# EAGLE board pico-glitcher-v1 v89 (EAGLE 9.7.0)
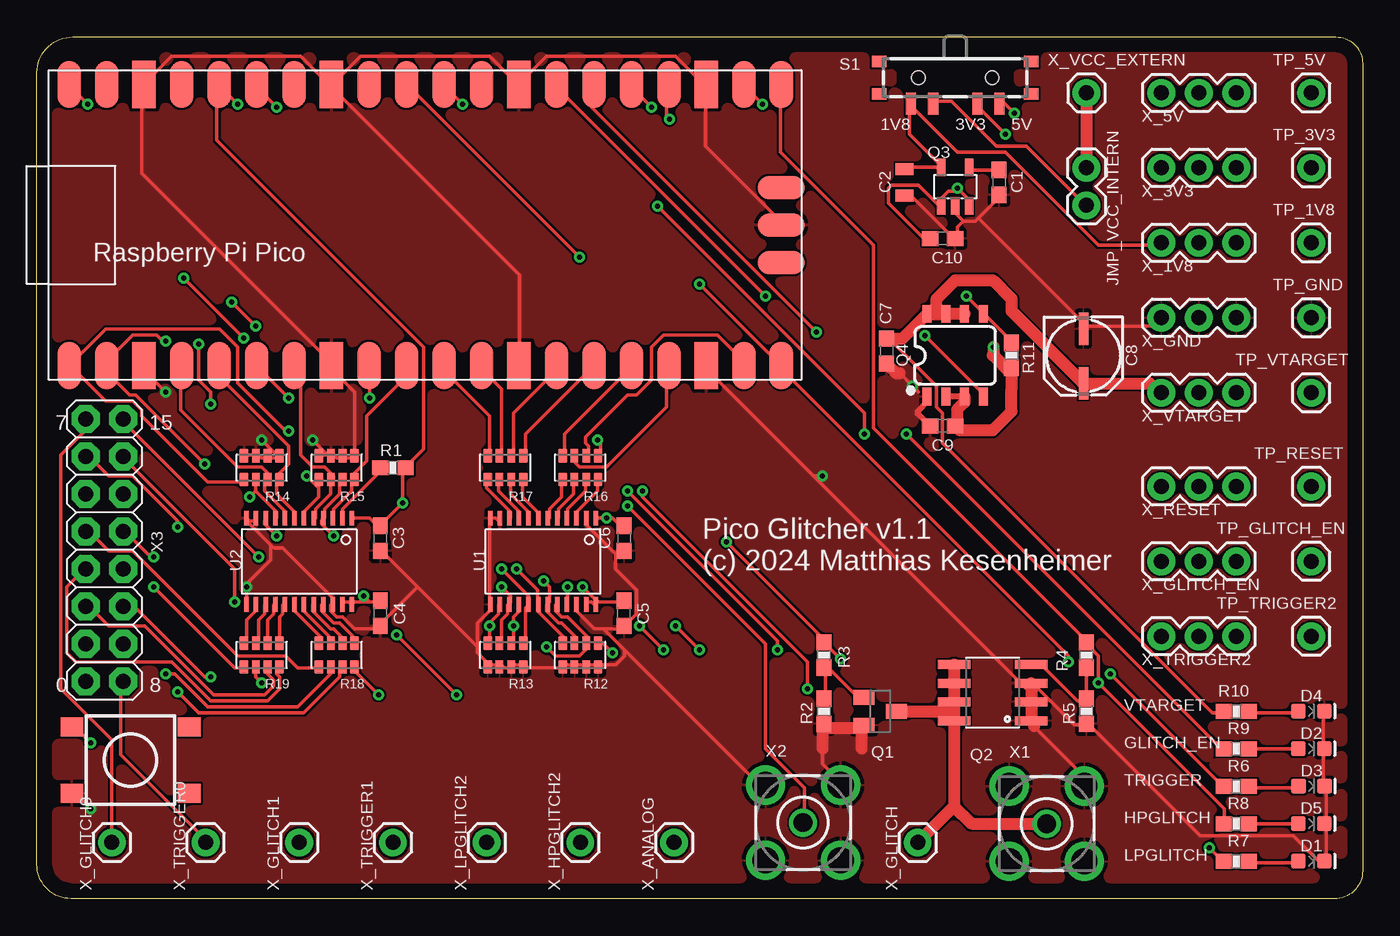
[diagram p0: board, top side]
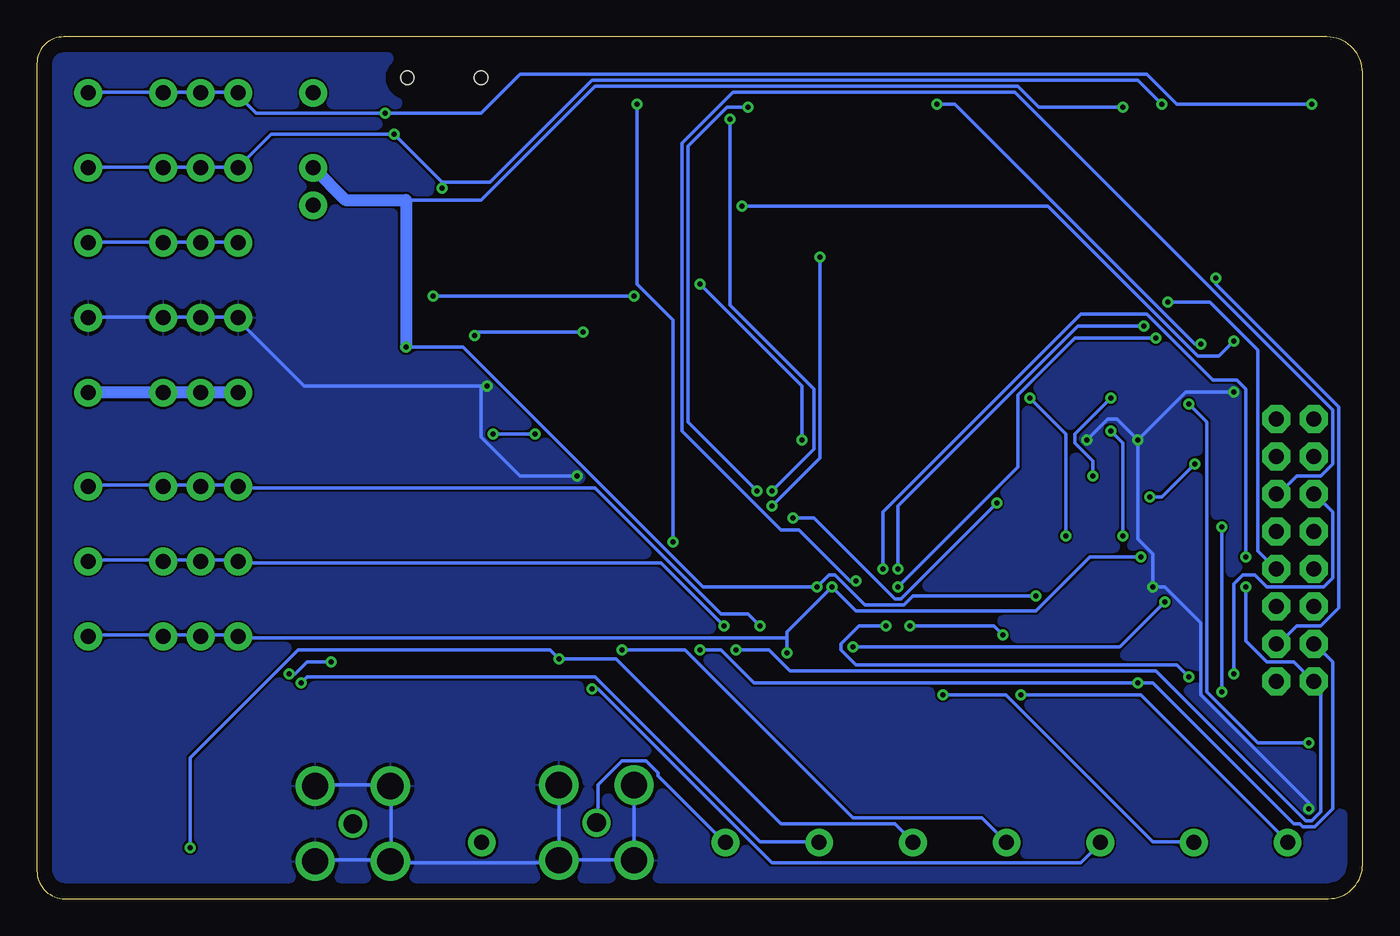
[diagram p1: board, bottom side, seen from below]

Size 89.84 x 58.41 mm. Coordinates in mm from the lower left corner, seen from the top.
Outline: 0,55.98 arc-90 2.43,58.41 88.04,58.41 arc-90 89.84,56.61 89.84,1.89 arc-90 87.95,0 2.32,0 arc-90 0,2.32 0,55.98
Copper layers (1*16): Top / Bottom
Stack-up Default Layer Stack: Top User Defined 0.035mm / Dielectric-1 User Defined 1.5mm / Bottom User Defined 0.035mm
Design rules: minimum drill size 0.35mm, minimum copper width 10mil, keepout clearance 0mil, drill distance 6mil, via restrict clearance 0mil, dimension clearance 40mil, restrict clearance 0mil, copper clearance wire_polygon to wire_polygon 6mil, copper clearance wire_polygon to pad_smd 6mil, copper clearance wire_polygon to via 6mil, copper clearance pad_smd to pad_smd 6mil, copper clearance pad_smd to via 6mil, copper clearance via to via 6mil, copper clearance smd to pad (same net) 6mil, copper clearance smd to via (same net) 6mil, copper clearance smd to smd (same net) 6mil

## Footprints (pad centres in the part's own frame; a part is rotated, then mirrored left to right if it is on the bottom)
0603 = smd 1.1 x 1: 1 -0.85,0; 2 0.85,0
0805 = smd 0.8 x 1.2: 1 -0.9,0; 2 0.9,0
PANASONIC_C = smd 2.2 x 0.65: + 1.9,-0.2; - -1.8,-0.2
LED-0603 = smd 1 x 1: A -0.877,0; C 0.877,0
1X02 = drill 1.016 pad 1.88: 1 0,0; 2 2.54,0
RPI_PICO = smd 3.2 x 1.6: 3V3 9.525,13.97; 3V3_EN 9.525,16.51; ADC_VREF 9.525,11.43; AGND 9.525,6.35; GND@1 -9.525,19.05; GND@2 -9.525,6.35; GND@3 -9.525,-6.35; GND@4 -9.525,-19.05; GND@6 9.525,-19.05; GND@7 9.525,-6.35; GND@8 9.525,19.05; GP0 -9.525,24.13; GP1 -9.525,21.59; GP2 -9.525,16.51; GP3 -9.525,13.97; GP4 -9.525,11.43; GP5 -9.525,8.89; GP6 -9.525,3.81; GP7 -9.525,1.27; GP8 -9.525,-1.27; GP9 -9.525,-3.81; GP10 -9.525,-8.89; GP11 -9.525,-11.43; GP12 -9.525,-13.97; GP13 -9.525,-16.51; GP14 -9.525,-21.59; GP15 -9.525,-24.13; GP16 9.525,-24.13; GP17 9.525,-21.59; GP18 9.525,-16.51; GP19 9.525,-13.97; GP20 9.525,-11.43; GP21 9.525,-8.89; GP22 9.525,-3.81; GP26_A0 9.525,1.27; GP27_A1 9.525,3.81; GP28_A2 9.525,8.89; RUN 9.525,-1.27; VBUS 9.525,24.13; VSYS 9.525,21.59 | smd 1.6 x 3.2: GND@5 0,-24.13; SWCLK -2.54,-24.13; SWDIO 2.54,-24.13
SOT23 = smd 1 x 1.4: 1 -0.95,-1.1; 2 0.95,-1.1; 3 0,1.1
SO08 = smd 0.61 x 2.21: 1 -1.905,-2.616; 2 -0.635,-2.616; 3 0.635,-2.616; 4 1.905,-2.616; 5 1.905,2.616; 6 0.635,2.616; 7 -0.635,2.616; 8 -1.905,2.616
SOT23-5L = smd 0.55 x 1.2: 1 -0.95,-1.3; 2 0,-1.3; 3 0.95,-1.3; 4 0.95,1.3; 5 -0.95,1.3
SO08' = smd 0.6 x 1.2: 1 -1.905,-2.8; 2 -0.635,-2.8; 3 0.635,-2.8; 4 1.905,-2.8; 5 1.905,2.8; 6 0.635,2.8; 7 -0.635,2.8; 8 -1.905,2.8
0603-RES = smd 1.1 x 1: 1 -0.85,0; 2 0.85,0
742C083103JP = smd 0.59 x 0.92: 1 -1.2,-0.8; 2 -0.4,-0.8; 3 0.4,-0.8; 4 1.2,-0.8; 5 1.2,0.8; 6 0.4,0.8; 7 -0.4,0.8; 8 -1.2,0.8
SWITCH-SP3T-SMD = smd 0.7 x 1.5: 1 3,-1.75; 2 1.5,-1.75; 3 -1.5,-1.75; 4 -3,-1.75 | smd 1 x 0.8: P$1 -5.15,-1.1; P$2 -5.15,1.1; P$3 5.15,1.1; P$4 5.15,-1.1 | hole 0.9: 2.5,0; -2.5,0
TACTILE_SWITCH_TALL = smd 1.55 x 1.3: A1 -3.975,-2.25; A2 3.975,-2.25; B1 -3.975,2.25; B2 3.975,2.25
1X01 = drill 1.016 pad 1.88: 1 0,0
TSSOP24 = smd 0.305 x 0.991: 1 -3.575,-2.918; 2 -2.925,-2.918; 3 -2.275,-2.918; 4 -1.625,-2.918; 5 -0.975,-2.918; 6 -0.325,-2.918; 7 0.325,-2.918; 8 0.975,-2.918; 9 1.625,-2.918; 10 2.275,-2.918; 11 2.925,-2.918; 12 3.575,-2.918; 13 3.575,2.918; 14 2.925,2.918; 15 2.275,2.918; 16 1.625,2.918; 17 0.975,2.918; 18 0.325,2.918; 19 -0.325,2.918; 20 -0.975,2.918; 21 -1.625,2.918; 22 -2.275,2.918; 23 -2.925,2.918; 24 -3.575,2.918
BU-SMA-V = drill 1.27: 1 0,0 | drill 1.778: 2 -2.55,2.55; 3 2.55,2.55; 4 2.55,-2.55; 5 -2.55,-2.55
2X8 = drill 1.016 pad 1.88 octagon: 1 0,0; 2 0,2.54; 3 2.54,0; 4 2.54,2.54; 5 5.08,0; 6 5.08,2.54; 7 7.62,0; 8 7.62,2.54; 9 10.16,0; 10 10.16,2.54; 11 12.7,0; 12 12.7,2.54; 13 15.24,0; 14 15.24,2.54; 15 17.78,0; 16 17.78,2.54
1X03 = drill 1.016 pad 1.88: 1 0,0; 2 2.54,0; 3 5.08,0

## Placement (x,y rotation side)
C1  0.01uF  [0603]  65.19,48.55 270 top
C2  2.2u  [0805]  58.79,48.55 270 top
C3  0.1uF  [0603]  23.28,24.42 270 top
C4  0.1uF  [0603]  23.28,19.34 90 top
C5  0.1uF  [0603]  39.79,19.34 90 top
C6  0.1uF  [0603]  39.79,24.42 270 top
C7  0.1uF  [0603]  57.57,37.12 270 top
C8  22uF  [PANASONIC_C]  71.12,36.83 270 top
C9  0.1uF  [0603]  61.38,32.04 0 top
C10  0.1uF  [0603]  61.38,44.74 0 top
D1  LED_RED_LPGLITCH  [LED-0603]  86.36,2.54 0 top
D2  LED_BLUE_GLITCH_EN  [LED-0603]  86.36,10.16 0 top
D3  LED_BLUE_TRIGGER2  [LED-0603]  86.37,7.62 0 top
D4  LED_RED_TARGET_POWER  [LED-0603]  86.36,12.7 0 top
D5  LED_RED_HPGLITCH  [LED-0603]  86.36,5.08 0 top
JMP_VCC_INTERN  JMP_VCC_INTERN  [1X02]  71.12,49.53 270 top
PICO  Raspberry Pi  [RPI_PICO]  26.31,45.66 90 top
Q1  IRLML2502  [SOT23]  57.15,12.7 270 top
Q2  IRF7807PBF  [SO08]  64.77,13.97 90 top
Q3  TPS 79318  [SOT23-5L]  62.23,48.26 0 top
Q4  TPS2041  [SO08']  62.23,36.83 0 top
R1  10K  [0603-RES]  24.13,29.21 0 top
R2  10K  [0603-RES]  53.34,12.7 90 top
R3  1R  [0603-RES]  53.34,16.51 90 top
R4  1R  [0603-RES]  71.12,16.51 90 top
R5  10K  [0603-RES]  71.12,12.7 90 top
R6  168  [0603-RES]  81.28,10.16 180 top
R7  168  [0603-RES]  81.28,2.54 180 top
R8  168  [0603-RES]  81.28,7.62 180 top
R9  220  [0603-RES]  81.28,12.7 180 top
R10  168  [0603-RES]  81.28,5.08 180 top
R11  10K  [0603-RES]  66.04,36.83 270 top
R12  10k  [742C083103JP]  36.83,16.51 180 top
R13  10k  [742C083103JP]  31.75,16.51 180 top
R14  10k  [742C083103JP]  15.24,29.21 180 top
R15  10k  [742C083103JP]  20.32,29.21 180 top
R16  100  [742C083103JP]  36.83,29.21 180 top
R17  100  [742C083103JP]  31.75,29.21 180 top
R18  100  [742C083103JP]  20.32,16.51 180 top
R19  100  [742C083103JP]  15.24,16.51 180 top
S1  Micro Slide Switch  [SWITCH-SP3T-SMD]  62.23,55.64 0 top
S_RST  SWITCH-MOMENTARY-2  [TACTILE_SWITCH_TALL]  6.35,9.39 180 top
TP_1V8  PINHDR_1X1  [1X01]  86.36,44.45 0 top
TP_3V3  PINHDR_1X1  [1X01]  86.36,49.53 0 top
TP_5V  M01PTH  [1X01]  86.36,54.61 0 top
TP_GLITCH_EN  PINHDR_1X1  [1X01]  86.36,22.86 0 top
TP_GND  PINHDR_1X1  [1X01]  86.36,39.37 0 top
TP_RESET  PINHDR_1X1  [1X01]  86.36,27.94 0 top
TP_TRIGGER2  PINHDR_1X1  [1X01]  86.36,17.78 0 top
TP_VTARGET  PINHDR_1X1  [1X01]  86.36,34.29 0 top
U1  NH245  [TSSOP24]  34.29,22.86 180 top
U2  NH245  [TSSOP24]  17.78,22.86 180 top
X1  BU-SMA-V  [BU-SMA-V]  68.43,5.08 0 top
X2  BU-SMA-V  [BU-SMA-V]  51.92,5.15 0 top
X3  M08X2  [2X8]  3.3,32.51 270 top
X_1V8  PINHDR_3X1  [1X03]  76.2,44.45 0 top
X_3V3  PINHDR_3X1  [1X03]  76.2,49.53 0 top
X_5V  PINHDR_3X1  [1X03]  76.2,54.61 0 top
X_ANALOG  PINHDR_1X1  [1X01]  43.18,3.81 0 top
X_GLITCH  PINHDR_1X1  [1X01]  59.69,3.81 0 top
X_GLITCH0  PINHDR_1X1  [1X01]  5.08,3.81 0 top
X_GLITCH1  PINHDR_1X1  [1X01]  17.78,3.81 0 top
X_GLITCH_EN  PINHDR_3X1  [1X03]  76.2,22.86 0 top
X_GND  PINHDR_3X1  [1X03]  76.2,39.37 0 top
X_HPGLITCH2  PINHDR_1X1  [1X01]  36.83,3.81 0 top
X_LPGLITCH2  PINHDR_1X1  [1X01]  30.48,3.81 0 top
X_RESET  PINHDR_3X1  [1X03]  76.2,27.94 0 top
X_TRIGGER0  PINHDR_1X1  [1X01]  11.43,3.81 0 top
X_TRIGGER1  PINHDR_1X1  [1X01]  24.13,3.81 0 top
X_TRIGGER2  PINHDR_3X1  [1X03]  76.2,17.78 0 top
X_VCC_EXTERN  PINHDR_1X1  [1X01]  71.12,54.61 0 top
X_VTARGET  PINHDR_3X1  [1X03]  76.2,34.29 0 top

## Library data of the parts
C1 = SparkFun-Capacitors; PROD_ID: CAP-16503; VALUE: 0.1uF
C2 = SparkFun-Capacitors
C3-C7 C9 C10 = SparkFun-Capacitors; PROD_ID: CAP-16503
C8 = SparkFun-Capacitors; PROD_ID: CAP-08618
D1-D5 = SparkFun-LED
JMP_VCC_INTERN TP_1V8 TP_3V3 TP_5V TP_GLITCH_EN TP_GND TP_RESET TP_TRIGGER2 TP_VTARGET X3 X_1V8 X_3V3 X_5V X_ANALOG X_GLITCH X_GLITCH0 X_GLITCH1 X_GLITCH_EN X_GND X_HPGLITCH2 X_LPGLITCH2 X_RESET X_TRIGGER0 X_TRIGGER1 X_TRIGGER2 X_VCC_EXTERN X_VTARGET = SparkFun-Connectors
PICO = RaspberryPi_Pico
Q1 = Transistor; CATEGORY: Transistor; SUB-CATEGORY: MOSFET; TYPE: N-Channel
Q2 S1 S_RST = SparkFun
Q3 = tps769xx
Q4 = TPS2041
R1-R11 = SparkFun-Resistors; PROD_ID: RES-00824
R12-R19 = Resistor Array; CREATED_BY: PCBLayout.com; DIGIKEY_PN: 742C083103JPTR-ND; MANUFACTURER: CTS Resistor Products; MPN: 742C083103JP; PACKAGE: 1206
U1 U2 = TI_NH245_SN74LVC8T245
X1 X2 = con-coax; OC_FARNELL: unknown; OC_NEWARK: unknown

## Nets
+1V8: C2.1 Q3.5 S1.4 TP_1V8.1 X_1V8.1 X_1V8.2 X_1V8.3
+3V3: C3.1 C6.1 C10.1 PICO.3V3 Q3.1 Q3.3 R1.2 S1.2 TP_3V3.1 U1.1 U2.1 X_3V3.1 X_3V3.2 X_3V3.3
+5V: PICO.VBUS S1.1 TP_5V.1 X_5V.1 X_5V.2 X_5V.3
ANALOG: PICO.GP26_A0 X2.1 X_ANALOG.1
GLITCH: Q1.3 Q2.5 Q2.6 Q2.7 Q2.8 X1.1 X_GLITCH.1
GND: C1.2 C2.2 C3.2 C4.1 C5.1 C6.2 C7.2 C8.- C9.1 C10.2 D1.C D2.C D3.C D4.C D5.C PICO.AGND PICO.GND@1 PICO.GND@2 PICO.GND@3 PICO.GND@4 PICO.GND@5 PICO.GND@6 PICO.GND@7 PICO.GND@8 Q1.2 Q2.1 Q2.2 Q2.3 Q3.2 Q4.1 R2.1 R5.1 R12.5 R12.6 R12.7 R12.8 R13.5 R13.6 R13.7 R13.8 R14.1 R14.2 R14.3 R14.4 R15.1 R15.2 R15.3 R15.4 S_RST.B2 TP_GND.1 U1.2 U1.11 U1.12 U1.13 U1.22 U2.11 U2.12 U2.13 U2.22 X1.2 X1.3 X1.4 X1.5 X2.2 X2.3 X2.4 X2.5 X_GND.1 X_GND.2 X_GND.3
GP0: PICO.GP0 R14.5 U2.10
GP1: PICO.GP1 R6.2 R14.6 U2.9
GP2: PICO.GP2 R14.7 U2.8
GP3: PICO.GP3 R14.8 U2.7
GP4: PICO.GP4 R15.5 U2.6
GP5: PICO.GP5 R15.6 U2.5
GP6: PICO.GP6 R15.7 U2.4
GP7: PICO.GP7 R15.8 U2.3
GP8: PICO.GP8 R17.4
GP9: PICO.GP9 R17.3
GP10: PICO.GP10 R17.2
GP11: PICO.GP11 R17.1
GP12: PICO.GP12 R16.4
GP13: PICO.GP13 R16.3
GP14: PICO.GP14 R16.2
GP15: PICO.GP15 R8.2 R16.1
HPGLITCH2: PICO.GP16 R4.2 R10.2 X_HPGLITCH2.1
JVCC: JMP_VCC_INTERN.2 S1.3
LPGLITCH2: PICO.GP17 R3.2 R7.2 X_LPGLITCH2.1
N$1: D3.A R8.1
N$2: D1.A R7.1
N$3: Q1.1 R2.2 R3.1
N$4: D2.A R6.1
N$5: Q2.4 R4.1 R5.2
N$6: D4.A R9.1
N$7: D5.A R10.1
N$8: C1.1 Q3.4
N$9: R18.1 U2.21
N$10: R18.2 U2.20
N$11: R18.3 U2.19
N$12: R18.4 U2.18
N$13: R19.1 U2.17
N$14: R19.2 U2.16
N$15: R19.3 U2.15
N$16: R19.4 U2.14
N$17: R16.8 U1.3
N$18: R16.7 U1.4
N$19: R16.6 U1.5
N$20: R16.5 U1.6
N$21: R17.8 U1.7
N$22: R17.7 U1.8
N$23: R17.6 U1.9
N$24: R17.5 U1.10
N$26: R12.1 TP_TRIGGER2.1 U1.21 X3.2 X_TRIGGER2.1 X_TRIGGER2.2 X_TRIGGER2.3
N$33: R1.1 U2.2
N$34: PICO.RUN S_RST.A2
N$37: PICO.GP19 X_GLITCH1.1
N$38: R19.5 TP_RESET.1 X3.15 X_RESET.1 X_RESET.2 X_RESET.3
N$39: R19.6 TP_GLITCH_EN.1 X3.13 X_GLITCH_EN.1 X_GLITCH_EN.2 X_GLITCH_EN.3
N$40: R19.7 X3.11
N$41: R19.8 X3.9
N$42: R18.5 X3.7
N$43: R18.6 X3.5
N$44: R18.7 X3.3
N$45: R18.8 X3.1 X_GLITCH0.1
N$47: R12.2 U1.20 X3.4
N$48: R12.3 U1.19 X3.6
N$49: R12.4 U1.18 X3.8
N$50: R13.1 U1.17 X3.10
N$51: R13.2 U1.16 X3.12
N$52: R13.3 U1.15 X3.14
N$53: R13.4 U1.14 X3.16 X_TRIGGER0.1
N$54: PICO.GP18 X_TRIGGER1.1
VCC: C4.2 C5.2 C9.2 JMP_VCC_INTERN.1 PICO.ADC_VREF Q4.2 Q4.3 R11.2 U1.23 U1.24 U2.23 U2.24 X_VCC_EXTERN.1
VTARGET: C7.1 C8.+ Q4.6 Q4.7 Q4.8 R9.2 TP_VTARGET.1 X_VTARGET.1 X_VTARGET.2 X_VTARGET.3
VTARGET_EN: PICO.GP20 Q4.4
VTARGET_OC: PICO.GP21 Q4.5 R11.1

## Tracks (layer width: path | path; a pad name or v marks a point on that pad's centre or on a via)
+1V8
  Top 0.254: C2.1 58.93,49.58 60.96,49.58 61.16,49.38 Q3.5 61.37,49.58 59.13,51.82 59.13,53.85 | 59.13,53.85 62.38,50.6 65.63,50.6 71.93,44.3 76.2,44.3 X_1V8.1 | 59.13,53.85 S1.4
  Bottom 0.254: 81.28,44.5 78.84,44.5 X_1V8.2 78.64,44.5 76.2,44.5 X_1V8.1 | 81.28,44.5 86.36,44.5 TP_1V8.1 | 81.28,44.5 X_1V8.3
+3V3  (via drill 0.35)
  Top 0.254: C10.1 60.35,44.7 60.15,44.7 57.71,47.14 57.71,48.16 57.91,48.36 59.74,48.36 61.16,46.94 Q3.1 61.37,47.14 61.37,47.55 61.77,47.95 62.59,47.95 | 62.59,47.95 63.2,47.35 63.2,47.14 Q3.3 | v65.63,51.82 63.6,53.85 S1.2 | v62.38,48.16 62.59,47.95 | U1.1 38,25.81 v38.61,25.81 39.01,25.81 39.62,25.2 C6.1 | U2.1 21.34,25.81 22.55,25.81 23.16,25.2 C3.1 23.37,25.4 v24.79,26.82 24.79,29.06 R1.2 24.99,29.26 26.21,30.48 26.21,37.39 12.19,51.41 12.19,55.07 PICO.3V3 12.39,55.07 v13.61,53.85
  Bottom 0.254: 81.28,49.58 78.84,49.58 X_3V3.2 78.64,49.58 76.2,49.58 | 81.28,49.58 86.36,49.58 TP_3V3.1 | 81.28,49.58 X_3V3.3 | 76.2,49.58 73.97,51.82 v65.63,51.82 62.38,48.56 | 62.38,48.56 v62.38,48.16 | 76.2,49.58 X_3V3.1 | v38.61,25.81 37.19,25.81 31.7,20.32 31.29,20.32 v24.79,26.82 | 62.38,48.56 59.13,48.56 52.22,55.47 15.24,55.47 v13.61,53.85
+5V  (via drill 0.35)
  Top 0.254: v66.24,53.24 65.43,54.05 S1.1 | v3.45,53.85 2.23,55.07 PICO.VBUS
  Bottom 0.254: 81.28,54.66 78.84,54.66 X_5V.2 78.64,54.66 76.2,54.66 X_5V.1 76.2,54.46 74.98,53.24 v66.24,53.24 59.74,53.24 57.1,55.88 14.63,55.88 12.6,53.85 v3.45,53.85 | 81.28,54.66 86.36,54.66 TP_5V.1 | 81.28,54.66 X_5V.3
ANALOG  (via drill 0.35)
  Top 0.254: v36.78,43.48 25.2,55.07 PICO.GP26_A0 | v40.03,26.62 49.38,17.27 49.38,10.16 52.02,7.52 52.02,5.28 X2.1
  Bottom 0.254: v36.78,43.48 36.78,29.87 v40.03,26.62 | X_ANALOG.1 43.28,3.86 47.75,8.33 47.75,8.53 48.56,9.35 50.19,9.35 51.82,7.72 51.82,5.28 X2.1
GLITCH
  Top 0.813: 62.15,6.27 Q2.8 62.15,12.7 | 62.15,6.27 X_GLITCH.1 | 62.15,6.27 63.35,5.08 X1.1 | Q2.5 Q2.6 Q2.7 62.15,12.7 | Q1.3 62.15,12.7
GND  (via drill 0.35)
  Top 0.254: 45.31,55.07 45.31,51 50.6,45.72 PICO.GND@5 | 19.91,55.07 32.72,42.27 32.72,36.17 PICO.GND@3 | 45.31,55.07 43.28,57.1 34.54,57.1 32.72,55.27 PICO.GND@7 32.51,55.27 30.68,57.1 21.95,57.1 20.12,55.27 PICO.AGND 19.91,55.07 | 45.31,55.07 PICO.GND@6 | 19.71,30.07 19.3,30.07 R15.4 | 19.71,30.07 19.91,29.87 R15.3 | R15.3 20.12,30.07 20.32,29.87 20.52,29.87 R15.2 20.73,30.07 20.93,29.87 21.34,29.87 R15.1 21.54,30.07 21.54,34.34 19.91,35.97 PICO.GND@2 20.12,36.17 7.11,49.17 7.11,55.07 PICO.GND@8 7.32,55.27 9.14,57.1 17.88,57.1 19.91,55.07 | R14.4 14.22,30.07 14.63,30.07 14.83,29.87 R14.3 15.04,30.07 15.24,29.87 15.44,29.87 R14.2 15.65,30.07 15.85,29.87 16.26,29.87 R14.1 16.26,30.07 v15.24,31.09 | 15.85,23.98 15.85,22.96 14.22,21.34 v14.22,21.13 14.22,20.12 U2.13 | 15.85,23.98 14.22,25.6 U2.12 14.22,25.81 14.43,25.6 14.83,25.6 U2.11 | 15.85,23.98 16.05,23.77 16.66,23.77 20.12,20.32 20.12,20.12 U2.22 19.91,19.91 19.91,19.51 20.32,19.1 20.73,19.1 21.54,18.29 23.16,18.29 C4.1 23.37,18.49 23.37,18.69 25.81,21.13 | v3.66,6.1 2.44,7.32 S_RST.B2 | v8.74,34.34 7.11,35.97 PICO.GND@1 | v18.69,31.09 19.71,30.07 | 19.71,30.07 R15.3 | C2.2 58.93,47.75 59.13,47.75 62.18,44.7 C10.2 62.38,44.91 62.38,45.52 62.79,45.92 | 63.8,46.13 63.6,45.92 62.79,45.92 | 63.8,46.13 65.02,47.35 65.02,47.55 C1.2 | 62.79,45.92 62.18,46.53 62.18,46.94 Q3.2 | 63.8,46.13 71.12,38.81 | 59.74,34.34 v59.33,34.75 58.47,35.61 | 71.12,38.81 75.79,38.81 76.2,39.22 X_GND.1 | 71.12,38.81 C8.- | 39.22,23.37 37.19,25.4 37.19,25.6 U1.2 | 39.22,23.37 39.62,23.37 C6.2 | 38.41,18.29 39.62,18.29 C5.1 39.83,18.49 40.64,19.3 40.64,20.93 39.22,22.35 39.22,23.37
  Top 0.254: 38.41,18.29 37.8,18.29 36.58,19.51 36.58,19.91 U1.22 | U1.11 31.29,25.6 31.09,25.81 30.68,25.81 U1.12 30.68,25.6 30.68,20.12 U1.13 30.68,19.91 30.68,19.51 29.87,18.69 29.87,17.07 | 30.68,15.85 31.09,15.85 31.29,15.65 R13.6 31.5,15.85 31.7,15.65 32.11,15.65 R13.7 32.31,15.85 32.72,15.85 32.92,15.65 R13.8 33.12,15.85 33.33,15.65 35.56,15.65 R12.5 35.76,15.85 36.17,15.85 36.37,15.65 R12.6 36.58,15.85 36.98,15.85 37.19,15.65 R12.7 37.39,15.85 37.8,15.85 38,15.65 R12.8 38.2,15.85 39.22,15.85 39.83,16.46 39.83,16.87 | 29.87,17.07 29.87,16.66 30.68,15.85 | 30.68,15.85 R13.5 | 29.87,17.07 25.81,21.13 | 25.81,21.13 23.37,23.57 C3.2 | 39.83,16.87 38.41,18.29 | 55.88,11.58 Q1.2 | 53.24,11.79 53.24,10.16 53.24,9.14 54.66,7.72 X2.3 | D4.C 87.17,12.6 87.17,10.36 87.38,10.16 D2.C 87.17,10.16 87.17,7.92 87.38,7.72 D3.C 87.17,7.52 87.38,7.32 87.38,5.08 D5.C 87.17,5.08 87.38,4.88 87.38,2.64 D1.C 87.17,2.44 86.97,2.44 85.14,4.27 78.84,4.27 71.12,11.99 R5.1 71.12,11.79 70.31,11.79 67.46,14.63 Q2.3 67.26,14.43 67.46,14.22 67.46,13.82 | 67.46,13.82 67.46,13.41 Q2.2 | 67.46,13.82 52.63,28.65 | 52.63,28.65 45.31,35.97 PICO.GND@4 | 67.56,11.68 71.12,8.13 71.12,7.72 X1.3 | 39.83,16.87 49.17,7.52 X2.2 | 52.63,28.65 v53.24,28.65
  Top 0.406: Q4.1 60.33,33.66 59.69,33.02 59.69,32.88 C9.1
  Top 0.813: Q2.3 Q2.2 Q2.1 67.56,11.89 67.56,11.68 | 55.88,11.58 53.61,11.58 R2.1 53.24,11.75 53.24,10.16 | Q1.2 55.88,11.58 55.88,10.16 | C7.2 58.23,35.61 58.47,35.61
  Bottom 0.254: v3.66,6.1 3.66,6.5 10.97,13.82 10.97,18.69 13.41,21.13 v14.22,21.13 14.22,23.37 15.24,24.38 v15.24,31.09 | v8.74,34.34 11.99,34.34 v15.24,31.09 | v18.69,31.09 17.27,32.51 16.66,32.51 v15.24,31.09 | 81.28,39.42 78.84,39.42 X_GND.2 78.64,39.42 76.2,39.42 X_GND.1 76.2,39.22 71.73,34.75 59.74,34.75 | 81.28,39.42 86.36,39.42 TP_GND.1 | 81.28,39.42 X_GND.3 | 59.74,34.75 v59.33,34.75 | 49.38,2.64 49.38,7.52 X2.2 | 54.46,2.64 54.46,7.52 X2.3 | 54.46,2.64 49.38,2.64 | 49.38,2.64 X2.5 | 54.46,2.64 X2.4 54.66,2.44 65.84,2.44 X1.5 | X1.5 65.84,2.64 65.84,7.52 X1.2 66.04,7.72 70.92,7.72 X1.3 | X1.4 70.92,2.64 66.04,2.64 X1.5 | 59.74,34.75 59.74,31.29 57.1,28.65 v53.24,28.65
  pour Top: 0,58.42 90.17,58.42 90.17,0 0,0
  pour Bottom: 0,58.42 90.17,58.42 90.17,0 0,0
GP0  (via drill 0.35)
  Top 0.254: 2.23,36.17 4.67,33.73 6.5,33.73 7.11,33.12 7.11,32.72 11.58,28.25 14.02,28.25 R14.5 | v16.26,24.59 15.44,25.4 15.44,25.6 U2.10 | v17.07,31.7 16.87,31.7 13.61,34.95 13.61,37.39 12.39,38.61 4.67,38.61 2.23,36.17 | 2.23,36.17 PICO.GP0
  Bottom 0.254: v16.26,24.59 16.26,30.89 v17.07,31.7
GP1  (via drill 0.35)
  Top 0.254: 14.83,27.64 14.83,28.25 R14.6 | 14.83,27.64 16.26,26.21 16.26,25.81 U2.9 | v58.93,31.5 80.26,10.16 R6.2 | v56.08,31.5 56.08,32.92 v42.06,46.94 | v8.74,37.8 8.53,37.8 8.13,38.2 6.5,38.2 4.88,36.58 4.88,36.17 PICO.GP1 4.67,35.97 4.67,35.76 6.3,34.14 6.71,34.14 v11.38,29.46 | v14.43,27.23 14.83,27.64
  Bottom 0.254: v56.08,31.5 v58.93,31.5 | v42.06,46.94 21.34,46.94 11.18,36.78 9.75,36.78 v8.74,37.8 | v14.43,27.23 13.61,27.23 v11.38,29.46
GP2
  Top 0.254: U2.8 16.87,25.81 16.87,26.21 15.44,27.64 15.44,28.25 R14.7 15.65,28.45 15.65,28.85 15.24,29.26 13.61,29.26 9.75,33.12 9.75,35.97 PICO.GP2
GP3
  Top 0.254: U2.7 17.48,25.81 17.48,26.21 16.26,27.43 16.26,28.25 R14.8 16.46,28.45 16.46,28.85 17.07,29.46 17.07,30.68 12.19,35.56 12.19,35.97 PICO.GP3
GP4  (via drill 0.35)
  Top 0.254: 19.1,27.84 19.1,27.23 18.09,26.21 18.09,25.81 U2.6 | 19.1,27.84 19.1,28.25 R15.5 | v18.29,28.65 19.1,27.84 | v17.07,33.93 15.04,35.97 PICO.GP4
  Bottom 0.254: v18.29,28.65 18.29,29.67 19.51,30.89 19.51,31.5 v17.07,33.93
GP5
  Top 0.254: U2.5 18.9,25.81 18.9,26.42 19.91,27.43 19.91,28.25 R15.6 20.12,28.45 20.12,28.65 19.51,29.26 18.69,29.26 17.88,30.07 17.88,35.36 17.27,35.97 PICO.GP5
GP6  (via drill 0.35)
  Top 0.254: R15.7 20.52,28.25 20.52,27.43 19.51,26.42 19.51,25.81 U2.4 19.3,25.6 19.3,25.4 v20.12,24.59 | v22.55,33.93 22.55,35.76 22.35,35.97 PICO.GP6
  Bottom 0.254: v20.12,24.59 20.12,31.5 v22.55,33.93
GP7
  Top 0.254: U2.3 20.12,25.81 20.12,26.42 21.34,27.64 21.34,28.25 R15.8 21.54,28.45 21.54,28.85 22.35,29.67 22.35,32.72 24.99,35.36 24.99,35.97 PICO.GP7
GP8
  Top 0.254: R17.4 30.68,30.07 30.68,32.72 27.43,35.97 PICO.GP8
GP9
  Top 0.254: R17.3 31.5,30.07 31.5,34.54 30.07,35.97 PICO.GP9
GP10
  Top 0.254: R17.2 32.31,30.07 32.31,32.92 35.15,35.76 35.15,35.97 PICO.GP10
GP11
  Top 0.254: R17.1 33.12,30.07 33.12,31.5 37.59,35.97 PICO.GP11
GP12
  Top 0.254: R16.4 35.76,30.07 35.76,31.5 40.23,35.97 PICO.GP12
GP13
  Top 0.254: R16.3 36.37,29.87 36.37,29.67 36.78,29.26 38.61,29.26 42.67,33.33 42.67,35.97 PICO.GP13
GP14
  Top 0.254: R16.2 37.39,30.07 37.39,30.68 37.19,30.89 37.19,31.29 40.03,34.14 40.64,34.14 41.66,35.15 41.66,37.39 42.47,38.2 46.13,38.2 47.95,36.37 47.95,36.17 PICO.GP14
GP15  (via drill 0.35)
  Top 0.254: v38,31.09 38.2,30.89 38.2,30.07 R16.1 | v44.91,41.66 50.39,36.17 PICO.GP15 50.39,35.97 69.9,16.46 v69.9,16.05 | v72.75,15.24 80.26,7.72 R8.2
  Bottom 0.254: v38,31.09 38,34.75 v44.91,41.66 | v72.75,15.24 72.34,15.24 71.53,16.05 v69.9,16.05
HPGLITCH2  (via drill 0.35)
  Top 0.254: R10.2 80.47,5.08 80.47,6.1 v71.93,14.63 71.93,16.46 71.12,17.27 R4.2 71.12,17.48 56.69,31.9 56.69,44.3 50.39,50.6 50.39,55.07 PICO.GP16
  Bottom 0.254: v71.93,14.63 71.53,15.04 52.02,15.04 40.84,3.86 36.98,3.86 X_HPGLITCH2.1
JVCC
  Top 0.254: S1.3 60.76,54.05 61.98,54.05 65.02,51 67.06,51 71.12,46.94 JMP_VCC_INTERN.2
LPGLITCH2  (via drill 0.35)
  Top 0.254: v54.46,16.26 53.44,17.27 R3.2 53.44,17.48 v46.74,24.18 | v79.45,3.45 80.26,2.64 R7.2 | v49.17,53.85 47.95,55.07 PICO.GP17
  Bottom 0.254: X_LPGLITCH2.1 30.48,3.86 31.7,5.08 39.42,5.08 50.6,16.26 v54.46,16.26 55.07,16.87 72.14,16.87 79.45,9.55 v79.45,3.45 | v49.17,53.85 49.17,41.66 46.74,39.22 v46.74,24.18
N$1
  Top 0.254: D3.A 85.34,7.52 82.5,7.52 82.3,7.72 R8.1
N$2
  Top 0.254: D1.A 85.34,2.44 82.5,2.44 82.3,2.64 R7.1
N$3
  Top 0.254: R2.2 53.44,13.61 53.44,15.44 53.24,15.65 R3.1 53.44,15.85 55.68,13.61 55.88,13.61 Q1.1
N$4
  Top 0.254: R6.1 D2.A
N$5
  Top 0.254: R4.1 R5.2 71.12,13.41 70.51,13.41 67.87,16.05 67.46,16.05 Q2.4
N$6
  Top 0.254: D4.A 85.34,12.6 82.5,12.6 82.3,12.8 R9.1
N$7
  Top 0.254: R10.1 D5.A
N$8
  Top 0.254: C1.1 65.02,49.38 63.4,49.38 63.2,49.58 Q3.4
N$9
  Top 0.254: R18.1 21.54,17.48 21.54,17.68 20.52,18.69 20.12,18.69 19.3,19.51 19.3,19.91 U2.21
N$10
  Top 0.254: R18.2 20.73,17.48 20.73,17.68 20.12,18.29 19.91,18.29 18.69,19.51 18.69,19.91 U2.20
N$11
  Top 0.254: R18.3 20.12,17.48 18.09,19.51 18.09,19.91 U2.19
N$12
  Top 0.254: R18.4 19.3,17.48 19.3,17.68 17.48,19.51 17.48,19.91 U2.18
N$13
  Top 0.254: R19.1 16.46,17.48 16.46,19.1 16.66,19.3 16.66,19.91 U2.17
N$14
  Top 0.254: R19.2 15.65,17.48 15.65,18.9 16.05,19.3 16.05,19.91 U2.16
N$15
  Top 0.254: R19.3 15.04,17.48 15.04,18.9 15.44,19.3 15.44,19.91 U2.15
N$16
  Top 0.254: R19.4 14.22,17.48 14.22,18.9 14.83,19.51 14.83,19.91 U2.14
N$17
  Top 0.254: R16.8 38,28.25 38,27.64 36.58,26.21 36.58,25.81 U1.3
N$18
  Top 0.254: R16.7 37.19,28.25 37.19,27.64 35.97,26.42 35.97,25.81 U1.4
N$19
  Top 0.254: R16.6 36.37,28.25 36.37,27.43 35.36,26.42 35.36,25.81 U1.5
N$20
  Top 0.254: R16.5 35.56,28.25 35.56,27.23 34.75,26.42 34.75,25.81 U1.6
N$21
  Top 0.254: R17.8 32.92,28.25 32.92,27.23 33.93,26.21 33.93,25.81 U1.7
N$22
  Top 0.254: R17.7 32.11,28.25 32.11,27.43 33.33,26.21 33.33,25.81 U1.8
N$23
  Top 0.254: R17.6 31.29,28.25 31.29,27.64 32.72,26.21 32.72,25.81 U1.9
N$24
  Top 0.254: R17.5 30.48,28.25 30.48,27.84 32.11,26.21 32.11,25.81 U1.10
N$26  (via drill 0.35)
  Top 0.254: v39.01,16.66 38.2,17.48 R12.1 | v35.97,21.13 35.97,20.12 U1.21 | v15.04,23.16 5.69,32.51 X3.2
  Bottom 0.254: 81.28,17.88 78.84,17.88 X_TRIGGER2.2 78.64,17.88 76.2,17.88 X_TRIGGER2.1 76.2,17.68 39.01,17.68 | 81.28,17.88 86.36,17.88 TP_TRIGGER2.1 | 81.28,17.88 X_TRIGGER2.3 | 39.01,17.68 39.01,18.09 v35.97,21.13 34.34,19.51 22.15,19.51 18.49,23.16 v15.04,23.16 | 39.01,17.68 v39.01,16.66
N$33
  Top 0.254: U2.2 20.73,25.81 20.73,26.42 23.16,28.85 23.16,29.06 R1.1
N$34  (via drill 0.35)
  Top 0.254: v3.66,10.57 2.44,11.79 S_RST.A2 | v11.79,33.53 11.79,34.34 10.97,35.15 v10.97,37.59 | v28.85,53.85 27.64,55.07 PICO.RUN
  Bottom 0.254: v3.66,10.57 7.11,10.57 10.57,14.02 10.57,32.31 v11.79,33.53 | v10.97,37.59 11.38,37.59 27.64,53.85 v28.85,53.85
N$37  (via drill 0.35)
  Top 0.254: v41.66,53.65 40.23,55.07 PICO.GP19 | v41.05,27.64 41.05,27.23 52.22,16.05 v52.22,14.22
  Bottom 0.254: v41.66,53.65 43.08,53.65 45.72,51 45.72,32.31 v41.05,27.64 | v52.22,14.22 51.82,14.22 40.03,2.44 19.1,2.44 17.88,3.66 X_GLITCH1.1
N$38  (via drill 0.35)
  Top 0.254: v7.92,21.13 13.41,15.65 14.02,15.65 R19.5 | v42.47,16.87 v40.84,18.49
  Bottom 0.254: 81.28,28.04 78.84,28.04 X_RESET.2 78.64,28.04 76.2,28.04 X_RESET.1 76.2,27.84 52.02,27.84 43.48,19.3 41.66,19.3 v40.84,18.49 | 81.28,28.04 86.36,28.04 TP_RESET.1 | 81.28,28.04 X_RESET.3 | v7.92,21.13 7.92,17.48 6.5,16.05 4.67,16.05 3.45,14.83 X3.15 3.25,14.63 2.85,14.22 2.85,5.89 3.45,5.28 3.86,5.28 14.02,15.44 38.81,15.44 40.23,16.87 v42.47,16.87
N$39  (via drill 0.35)
  Top 0.254: v15.24,14.63 14.83,15.04 14.83,15.65 R19.6 | v44.91,16.87 v43.28,18.49
  Bottom 0.254: 81.28,22.96 78.84,22.96 X_GLITCH_EN.2 78.64,22.96 76.2,22.96 X_GLITCH_EN.1 76.2,22.76 47.55,22.76 v43.28,18.49 | 81.28,22.96 86.36,22.96 TP_GLITCH_EN.1 | 81.28,22.96 X_GLITCH_EN.3 | X3.13 3.25,17.27 2.03,16.05 2.03,6.1 3.25,4.88 4.06,4.88 4.27,5.08 4.67,5.08 14.22,14.63 v15.24,14.63 41.25,14.63 43.48,16.87 v44.91,16.87
N$40
  Top 0.254: R19.7 15.44,15.65 15.44,15.44 16.05,14.83 16.05,14.43 15.44,13.82 11.99,13.82 7.32,18.49 4.88,18.49 3.45,19.91 X3.11
N$41
  Top 0.254: R19.8 16.26,15.65 16.26,15.24 16.46,15.04 16.46,14.22 15.65,13.41 11.79,13.41 9.14,16.05 2.64,16.05 2.03,16.66 2.03,21.13 3.25,22.35 X3.9
N$42
  Top 0.254: R18.5 19.1,15.65 17.68,15.65 16.87,16.46 13.61,16.46 6.5,23.57 4.88,23.57 3.45,24.99 X3.7
N$43  (via drill 0.35)
  Top 0.254: v8.74,15.24 9.35,15.24 11.58,13.01 17.68,13.01 19.91,15.24 19.91,15.65 R18.6
  Bottom 0.254: v8.74,15.24 8.74,21.34 8.13,21.95 7.32,21.95 6.5,21.13 2.64,21.13 2.03,21.74 2.03,26.21 3.25,27.43 X3.5
N$44  (via drill 0.35)
  Top 0.254: v9.55,14.02 10.97,12.6 18.09,12.6 20.52,15.04 20.52,15.65 R18.7 | v9.55,25.2 9.55,25.6 6.5,28.65 4.88,28.65 3.45,30.07 X3.3
  Bottom 0.254: v9.55,25.2 v9.55,14.02
N$45  (via drill 0.35)
  Top 0.254: v23.16,13.82 21.34,15.65 R18.8 | X_GLITCH0.1 5.08,10.77 1.63,14.22 1.63,30.07 3.25,31.7 3.25,32.51 X3.1
  Bottom 0.254: v23.16,13.82 15.04,13.82 5.08,3.86 X_GLITCH0.1
N$47  (via drill 0.35)
  Top 0.254: U1.20 35.15,19.91 35.15,19.51 35.56,19.1 35.97,19.1 37.39,17.68 37.39,17.48 R12.2 37.19,17.27 37.19,16.87 36.78,16.46 35.15,16.46 v34.54,17.07 | v13.41,20.12 13.41,22.35 5.89,29.87 X3.4
  Bottom 0.254: v34.54,17.07 16.46,17.07 v13.41,20.12
N$48  (via drill 0.35)
  Top 0.254: R12.3 36.58,17.48 36.58,17.68 35.56,18.69 35.36,18.69 34.54,19.51 34.54,19.91 U1.19 34.75,20.12 34.75,21.13 v34.34,21.54
  Bottom 0.254: v34.34,21.54 34.75,21.54 38.2,24.99 39.42,24.99 46.13,31.7 46.13,51.21 42.67,54.66 23.57,54.66 2.03,33.12 2.03,29.46 2.85,28.65 4.47,28.65 5.69,27.43 X3.6
N$49  (via drill 0.35)
  Top 0.254: R12.4 35.76,17.48 35.76,17.68 33.93,19.51 33.93,19.91 U1.18 33.93,20.12 33.93,20.93 v32.51,22.35 | v7.92,23.16 7.72,23.16 5.89,24.99 X3.8
  Bottom 0.254: v32.51,22.35 32.51,26.21 19.1,39.62 14.63,39.62 10.16,35.15 8.53,35.15 7.92,34.54 v7.92,23.16
N$50  (via drill 0.35)
  Top 0.254: R13.1 33.12,17.48 33.12,19.71 33.33,19.91 U1.17 33.33,20.12 33.33,20.52 v31.5,22.35 | v13.21,40.44 v14.83,38.81
  Bottom 0.254: v31.5,22.35 31.5,26.62 19.3,38.81 v14.83,38.81 | v13.21,40.44 10.36,40.44 7.11,37.19 7.11,23.57 5.89,22.35 X3.10
N$51  (via drill 0.35)
  Top 0.254: R13.2 32.31,17.48 v32.31,18.49 32.31,19.1 32.72,19.51 32.72,19.91 U1.16 | v11.79,15.04 11.38,15.04 6.5,19.91 5.89,19.91 X3.12
  Bottom 0.254: v32.31,18.49 34.14,18.49 35.36,17.27 35.36,16.87 34.34,15.85 12.6,15.85 v11.79,15.04
N$52  (via drill 0.35)
  Top 0.254: R13.3 31.5,17.48 31.5,18.9 31.9,19.3 31.9,19.91 U1.15 32.11,20.12 32.11,20.52 v31.5,21.13 | v9.96,42.06 v14.02,38
  Bottom 0.254: v31.5,21.13 23.37,29.26 23.37,34.14 19.51,38 v14.02,38 | v9.96,42.06 9.96,41.66 1.63,33.33 1.63,19.71 2.85,18.49 4.47,18.49 5.69,17.27 X3.14
N$53  (via drill 0.35)
  Top 0.254: R13.4 30.68,17.48 v30.68,18.49 30.68,18.69 31.29,19.3 31.29,19.91 U1.14 | v28.45,13.82 v24.38,17.88 | X3.16 5.69,14.63 5.69,9.75 11.58,3.86 X_TRIGGER0.1
  Bottom 0.254: v30.68,18.49 24.99,18.49 v24.38,17.88 | v28.45,13.82 24.18,13.82 14.22,3.86 11.58,3.86 X_TRIGGER0.1
N$54  (via drill 0.35)
  Top 0.254: v42.88,52.83 42.67,53.03 42.67,55.07 PICO.GP18 | v40.03,27.64 50.19,17.48 v50.19,16.87
  Bottom 0.254: v42.88,52.83 42.88,40.23 37.19,34.54 37.19,30.48 v40.03,27.64 | v50.19,16.87 45.92,16.87 34.54,5.49 25.81,5.49 X_TRIGGER1.1
VCC  (via drill 0.35)
  Top 0.254: U2.23 20.73,20.12 21.13,20.12 21.34,19.91 U2.24 21.34,20.12 22.55,20.12 | 22.55,20.12 23.16,20.12 C4.2 | U1.23 37.19,20.12 37.59,20.12 37.8,19.91 U1.24 38,20.12 | 38,20.12 39.62,20.12 C5.2 | v22.15,20.52 22.55,20.12 | 38,20.12 v36.98,21.13 | 66.04,34.54 66.04,35.56 R11.2 | v16.26,53.65 14.83,55.07 PICO.ADC_VREF
  Top 0.406: Q4.3 Q4.2
  Top 0.813: X_VCC_EXTERN.1 JMP_VCC_INTERN.1 | v64.82,37.39 64.82,36.88 64.77,36.83 66.04,35.56 | R11.2 66.04,34.54 66.04,33.02 64.77,31.75 62.52,31.75 C9.2 62.36,32.17 62.36,33.15 62.87,33.66 Q4.3
  Bottom 0.254: v22.15,20.52 30.48,20.52 31.09,19.91 33.73,19.91 35.76,21.95 36.17,21.95 v36.98,21.13 44.7,21.13 60.96,37.39 v64.82,37.39 | v16.26,53.65 21.95,53.65 23.37,55.07 52.02,55.07 59.74,47.35 64.82,47.35
  Bottom 0.813: JMP_VCC_INTERN.1 68.94,47.35 64.82,47.35 v64.82,37.39
VTARGET
  Top 0.254: 76.12,34.21 76.2,34.14 X_VTARGET.1 | R9.2 80.26,12.6 79.65,12.6 61.37,30.89 61.37,32.92 60.96,33.33 60.96,34.75 57.71,38 C7.1
  Top 0.813: 76.12,34.21 75.41,34.93 C8.+ 66.04,39.81 66.04,40.64 64.77,41.91 62.23,41.91 60.96,40.64 60.96,39.63 Q4.7 | C7.1 58.66,37.97 Q4.8 Q4.7 | Q4.6 Q4.7
  Bottom 0.254: 81.28,34.34 78.84,34.34 X_VTARGET.2 78.64,34.34 76.2,34.34 X_VTARGET.1 | 81.28,34.34 86.36,34.34 TP_VTARGET.1 | 81.28,34.34 X_VTARGET.3
  Bottom 0.813: X_VTARGET.1 TP_VTARGET.1
VTARGET_EN  (via drill 0.35)
  Top 0.254: v52.83,38.41 37.59,53.65 37.59,55.07 PICO.GP20 | Q4.4 64.14,34.21 v60.18,38.16
  Bottom 0.254: v52.83,38.41 59.94,38.41 v60.18,38.16
VTARGET_OC  (via drill 0.35)
  Top 0.254: R11.1 66.04,37.8 64.21,39.62 Q4.5 64.01,39.83 v62.99,40.84 | v49.38,40.84 35.15,55.07 PICO.GP21
  Bottom 0.254: v49.38,40.84 v62.99,40.84

## Text on the board
tNames: 1V8 | 3V3 | 5V | Raspberry Pi Pico | 7 | 15 | Pico Glitcher v1.1 / (c) 2024 Matthias Kesenheimer | 0 | 8 | VTARGET | GLITCH_EN | TRIGGER | HPGLITCH | LPGLITCH